# Altium PCB N6480.PcbDoc
Units mil, origin at the board's own origin, x right, y up, seen from the top; angles counter-clockwise.
Board outline 1350 x 1575 mil, 2 copper layers (Top Layer, Bottom Layer); 73 components, 80 nets, 350 pads, 86 vias.
Unrouted connection lines stored in the file: 2.
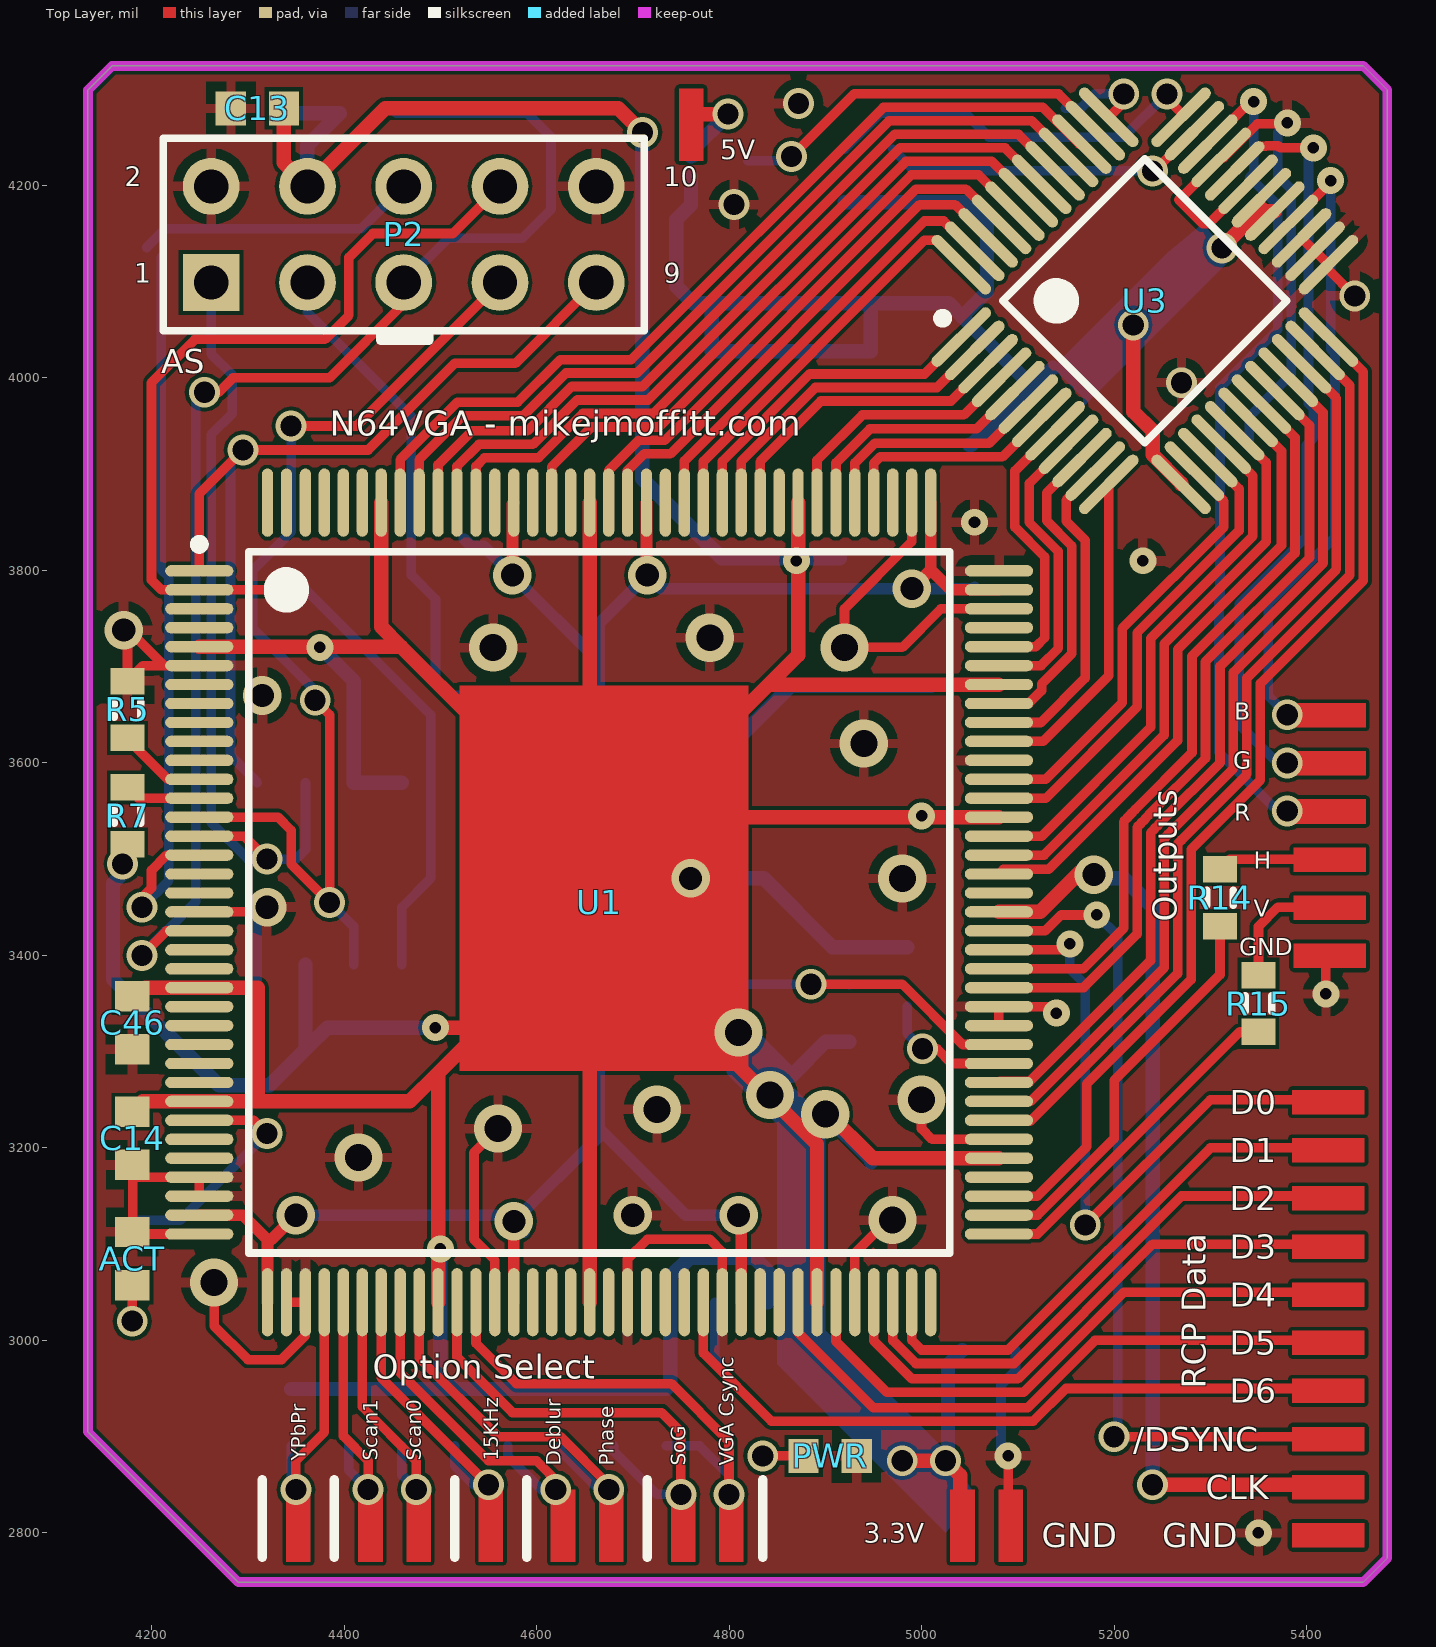
[diagram p0: Top Layer view]
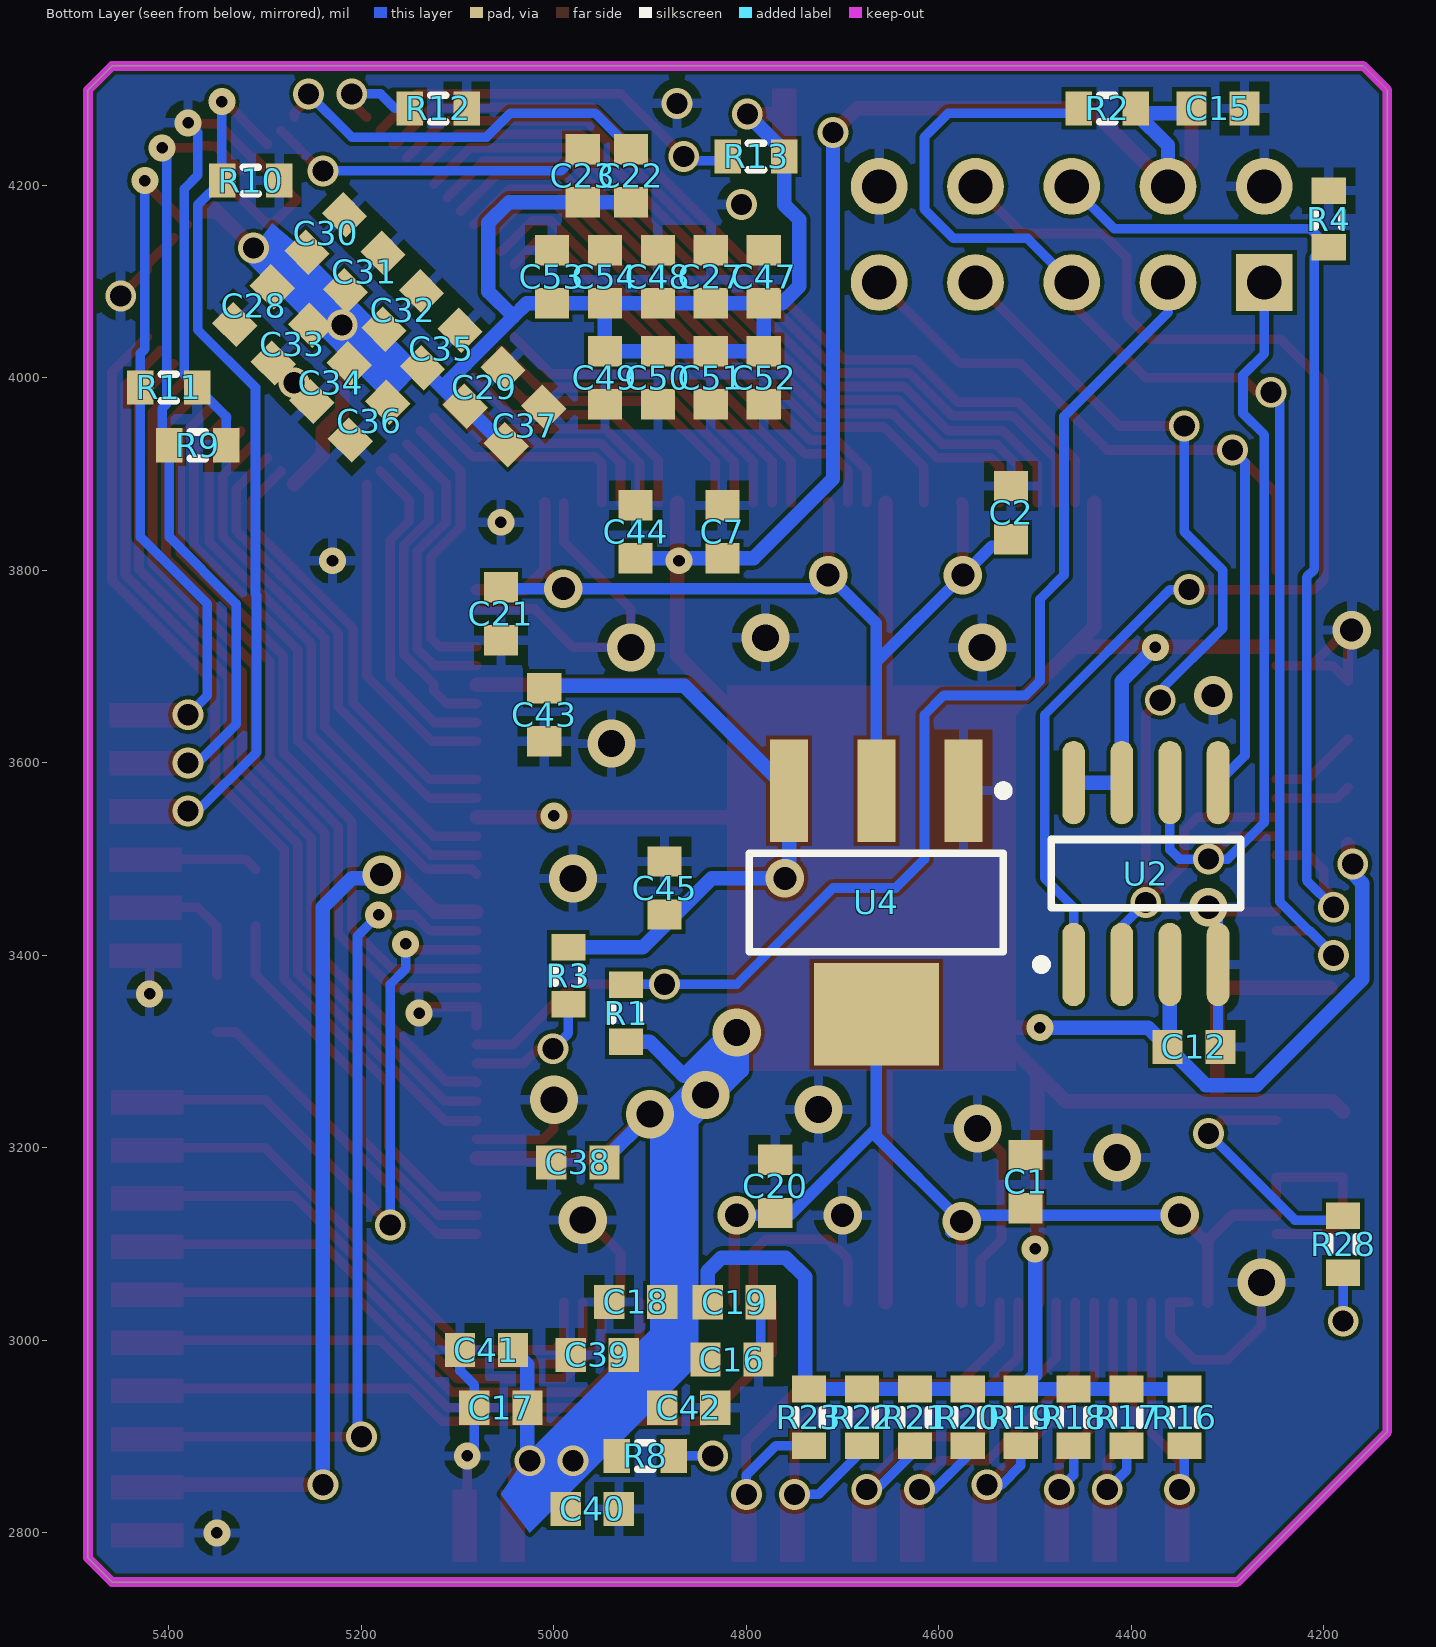
[diagram p1: Bottom Layer view, seen from below]

## Layer stack, top to bottom
Top Solder: solder mask 0.4, Solder Resist, Dk 3.5
Top Layer: signal copper 1.4
Dielectric 1: dielectric 12.6, FR-4, Dk 4.8
Bottom Layer: signal copper 1.4
Bottom Solder: solder mask 0.4, Solder Resist, Dk 3.5

## Board outline
4134,2905 4134,4299 4159,4324 5459,4324 5484,4299 5484,2774 5459,2749 4290,2749

## Design rules (kind name [scope] priority, off if disabled: settings)
Clearance [All] p1: gap=4
PolygonConnect [All] p1: connectstyle=Relief reliefconductorwidth=10 reliefentries=4 polygonreliefangle="90 Angle" airgapwidth=10
RoutingVias [All] p1: holewidth=22 width=32 viastyle="Through Hole" minholewidth=12 minwidth=28 maxholewidth=24 maxwidth=40
SolderMaskExpansion [All] p1: expansion=4
UnpouredPolygon [All] p1: allowunpoured=FALSE
Width Width_VCC3.3 [InNet('VCC3.3')] p1: maxlimit=25 minlimit=15 preferedwidth=20 minimp=50.000000 maximp=50.000000 favimp=50.000000
Width Width_VCC5 [InNet('VCC5.0')] p2: maxlimit=25 minlimit=15 preferedwidth=20 minimp=50.000000 maximp=50.000000 favimp=50.000000
Width Width_VCC1.2 [InNet('VCC1.2')] p3: maxlimit=20 minlimit=12 preferedwidth=16 minimp=50.000000 maximp=50.000000 favimp=50.000000
Width Width_CLK [InNet('CLK50')] p4: maxlimit=20 minlimit=8 preferedwidth=14 minimp=50.000000 maximp=50.000000 favimp=50.000000
Width Width_1 [All] p5: maxlimit=10 minlimit=10 preferedwidth=10
29 further rules are at their usual default settings.

## Components (designator, comment, footprint, x,y, rotation, side; value= is the part's Value field where it differs from the comment)
ACT "User LED" 1608[0603] 4180,3085 r90 top (schematic designator LED2)
C1 "Cap" 1608[0603] 4510,3165 r270 bottom
C2 "Cap" 1608[0603] 4525,3860 r270 bottom
C7 "Cap" 1608[0603] 4825,3840 r90 bottom
C12 "Cap" 1608[0603] 4335,3305 r0 bottom
C13 "Cap" 1608[0603] 4310,4280 r0 top
C14 "Cap" 1608[0603] 4180,3210 r90 top
C15 "Cap" 1608[0603] 4310,4280 r0 bottom
C16 "Cap" 1608[0603] 4815,2980 r0 bottom
C17 "Cap" 1608[0603] 5055,2930 r180 bottom
C18 "Cap" 1608[0603] 4915,3040 r180 bottom
C19 "Cap" 1608[0603] 4812.64,3039.65 r0 bottom
C20 "Cap" 1608[0603] 4770,3160 r270 bottom
C21 "Cap" 1608[0603] 5055,3755 r90 bottom
C22 "Cap" 1608[0603] 4920,4210 r90 bottom
C23 "Cap" 1608[0603] 4970,4210 r270 bottom
C27 "Cap" 1608[0603] 4837,4105 r270 bottom
C28 "Cap" 1608[0603] 5312,4075 r315 bottom
C29 "Cap" 1608[0603] 5072.4,3990 r135 bottom
C30 "Cap" 1608[0603] 5237,4150 r135 bottom
C31 "Cap" 1608[0603] 5197,4110 r135 bottom
C32 "Cap" 1608[0603] 5157,4070 r135 bottom
C33 "Cap" 1608[0603] 5272,4035 r315 bottom
C34 "Cap" 1608[0603] 5232,3995 r315 bottom
C35 "Cap" 1608[0603] 5117,4030 r135 bottom
C36 "Cap" 1608[0603] 5192,3955 r315 bottom
C37 "Cap" 1608[0603] 5030,3950 r135 bottom
C38 "Cap" 1608[0603] 4975,3185 r180 bottom
C39 "Cap" 1608[0603] 4955,2985 r180 bottom
C40 "Cap" 1608[0603] 4960,2825 r0 bottom
C41 "Cap" 1608[0603] 5070,2990 r180 bottom
C42 "Cap" 1608[0603] 4860,2930 r0 bottom
C43 "Cap" 1608[0603] 5010,3650 r90 bottom
C44 "Cap" 1608[0603] 4915,3840 r270 bottom
C45 "Cap" 1608[0603] 4885,3470 r270 bottom
C46 "Cap" 1608[0603] 4180,3330 r90 top
C47 "Cap" 1608[0603] 4782,4105 r90 bottom
C48 "Cap" 1608[0603] 4892,4105 r90 bottom
C49 "Cap" 1608[0603] 4947,4000 r270 bottom
C50 "Cap" 1608[0603] 4892,4000 r270 bottom
C51 "Cap" 1608[0603] 4837,4000 r270 bottom
C52 "Cap" 1608[0603] 4782,4000 r270 bottom
C53 "Cap" 1608[0603] 5002,4105 r90 bottom
C54 "Cap" 1608[0603] 4947,4105 r90 bottom
P2 "AS" HDR2X5 4262,4099 r0 top
PWR "Power LED" 1608[0603] 4905,2880 r0 top (schematic designator LED1)
R1 "Res3" J1-0603 4925,3340 r270 bottom
R2 "Res3" J1-0603 4425,4280 r180 bottom
R3 "Res3" J1-0603 4985,3379 r90 bottom
R4 "Res3" J1-0603 4195,4165 r270 bottom
R5 "Res3" J1-0603 4175,3655.47 r270 top
R7 "Res3" J1-0603 4175,3545 r270 top
R8 "Res3" J1-0603 4905,2880 r0 bottom
R9 "Res3" J1-0603 5370,3930 r0 bottom
R10 "Res3" J1-0603 5315,4205 r0 bottom
R11 "Res3" J1-0603 5400,3990 r0 bottom
R12 "Res3" J1-0603 5120,4280 r180 bottom
R13 "Res3" J1-0603 4790,4230 r180 bottom
R14 "Res3" J1-0603 5310,3460 r90 top
R15 "Res3" J1-0603 5350,3350 r90 top
R16 "Res3" J1-0603 4345,2920 r90 bottom
R17 "Res3" J1-0603 4405,2920 r90 bottom
R18 "Res3" J1-0603 4460,2920 r90 bottom
R19 "Res3" J1-0603 4515,2920 r90 bottom
R20 "Res3" J1-0603 4570,2920 r90 bottom
R21 "Res3" J1-0603 4625,2920 r90 bottom
R22 "Res3" J1-0603 4680,2920 r90 bottom
R23 "Res3" J1-0603 4735,2920 r90 bottom
R28 "Res3" J1-0603 4180,3100 r90 bottom
U1 "EP2C5T144C8N" TQFP144_N 4665,3455 r0 top
U2 "EPCS4SI8N" SOIC8_N 4385,3485 r90 bottom
U3 "ADV7123JSTZ240" ST-48_M 5232,4080 r45 top
U4 "LD1117AS12TR" SOT223_M 4665,3455 r270 bottom

## Footprints (in the part's own frame and the unit in brackets; to place one, negate y for a bottom-side part, rotate by r counter-clockwise, add the part's x,y. Pads: shape width x height; smd on the part's side, far side on the other; paste and mask are expansions set on the pad)
1608[0603] [mm] "Chip Capacitor, Body 1.6x0.8mm, IPC High Density"
  rect 0.8x0.9 smd: 1(-0.7,0) 2(0.7,0)
  body extent -0.87,-0.48 0.87,0.48, height 1.3
HDR2X5 [mm] "Connector; Header; 5x2 Position"
  rect 1.5x1.5 hole 0.9: 1(0,0)
  round 1.5 hole 0.9: 2(0,2.54) 3(2.54,0) 4(2.54,2.54) 5(5.08,0) 6(5.08,2.54) 7(7.62,0) 8(7.62,2.54) 9(10.16,0) 10(10.16,2.54)
  silkscreen extent -1.27,-1.27 11.43,3.81
J1-0603 [mm] "Chip Resistor, Body 1.6x0.8mm, IPC High Density"
  rect 0.7x0.9 smd: 1(-0.75,0) 2(0.75,0)
  silkscreen extent -0.2,-0.35 0.2,0.35, body extent -0.85,-0.48 0.85,0.48, height 0.9
SOIC8_N [mm] "SOIC, 8-Leads, Body 4.9x3.9mm, Pitch 1.27mm, IPC Medium Density"
  oval 2.2x0.6 smd: 1(-2.4,1.905) 2(-2.4,0.635) 3(-2.4,-0.635) 4(-2.4,-1.905) 5(2.4,-1.905) 6(2.4,-0.635) 7(2.4,0.635) 8(2.4,1.905)
  silkscreen extent -2.52,-2.5 0.9,2.88, body extent -2,-2.5 2,2.5, height 1.75
SOT223_M [mm] "SOT223, 4-Leads, Body 6.5x3.5mm, Pitch 2.3mm, Lead Span 7mm, IPC Low Density"
  rect 2.7x1 smd: 1(-2.95,2.3) 2(-2.95,0) 3(-2.95,-2.3)
  rect 2.7x3.3 smd: 4(2.95,0)
  silkscreen extent -3.07,-3.35 1.3,3.47, body extent -1.85,-3.35 1.85,3.35, height 1.7
ST-48_M [mm] "Thin QFP, 48-Leads, Body 7x7mm, Pitch 0.5mm, IPC Low Density"
  oval 2.1x0.3 smd: 1(-4.1,2.75) 2(-4.1,2.25) 3(-4.1,1.75) 4(-4.1,1.25) 5(-4.1,0.75) 6(-4.1,0.25) 7(-4.1,-0.25) 8(-4.1,-0.75) 9(-4.1,-1.25) 10(-4.1,-1.75) 11(-4.1,-2.25) 12(-4.1,-2.75) 25(4.1,-2.75) 26(4.1,-2.25) 27(4.1,-1.75) 28(4.1,-1.25) 29(4.1,-0.75) 30(4.1,-0.25) 31(4.1,0.25) 32(4.1,0.75) 33(4.1,1.25) 34(4.1,1.75) 35(4.1,2.25) 36(4.1,2.75)
  oval 0.3x2.1 smd: 13(-2.75,-4.1) 14(-2.25,-4.1) 15(-1.75,-4.1) 16(-1.25,-4.1) 17(-0.75,-4.1) 18(-0.25,-4.1) 19(0.25,-4.1) 20(0.75,-4.1) 21(1.25,-4.1) 22(1.75,-4.1) 23(2.25,-4.1) 24(2.75,-4.1) 37(2.75,4.1) 38(2.25,4.1) 39(1.75,4.1) 40(1.25,4.1) 41(0.75,4.1) 42(0.25,4.1) 43(-0.25,4.1) 44(-0.75,4.1) 45(-1.25,4.1) 46(-1.75,4.1) 47(-2.25,4.1) 48(-2.75,4.1)
  silkscreen extent -4.22,-2.65 2.65,3.57, body extent -3.5,-3.5 3.5,3.5, height 1.6
TQFP144_N [mm] "Thin QFP, 144-Leads, Body 20x20mm, Pitch 0.5mm, IPC Medium Density"
  oval 1.8x0.3 smd: 1(-10.55,8.75) 2(-10.55,8.25) 3(-10.55,7.75) 4(-10.55,7.25) 5(-10.55,6.75) 6(-10.55,6.25) 7(-10.55,5.75) 8(-10.55,5.25) 9(-10.55,4.75) 10(-10.55,4.25) 11(-10.55,3.75) 12(-10.55,3.25) 13(-10.55,2.75) 14(-10.55,2.25) 15(-10.55,1.75) 16(-10.55,1.25) 17(-10.55,0.75) 18(-10.55,0.25) 19(-10.55,-0.25) 20(-10.55,-0.75) 21(-10.55,-1.25) 22(-10.55,-1.75) 23(-10.55,-2.25) 24(-10.55,-2.75) 25(-10.55,-3.25) 26(-10.55,-3.75) 27(-10.55,-4.25) 28(-10.55,-4.75) 29(-10.55,-5.25) 30(-10.55,-5.75) 31(-10.55,-6.25) 32(-10.55,-6.75) 33(-10.55,-7.25) 34(-10.55,-7.75) 35(-10.55,-8.25) 36(-10.55,-8.75) 73(10.55,-8.75) 74(10.55,-8.25) 75(10.55,-7.75) 76(10.55,-7.25) 77(10.55,-6.75) 78(10.55,-6.25) 79(10.55,-5.75) 80(10.55,-5.25) 81(10.55,-4.75) 82(10.55,-4.25) 83(10.55,-3.75) 84(10.55,-3.25) 85(10.55,-2.75) 86(10.55,-2.25) 87(10.55,-1.75) 88(10.55,-1.25) 89(10.55,-0.75) 90(10.55,-0.25) 91(10.55,0.25) 92(10.55,0.75) 93(10.55,1.25) 94(10.55,1.75) 95(10.55,2.25) 96(10.55,2.75) 97(10.55,3.25) 98(10.55,3.75) 99(10.55,4.25) 100(10.55,4.75) 101(10.55,5.25) 102(10.55,5.75) 103(10.55,6.25) 104(10.55,6.75) 105(10.55,7.25) 106(10.55,7.75) 107(10.55,8.25) 108(10.55,8.75)
  oval 0.3x1.8 smd: 37(-8.75,-10.55) 38(-8.25,-10.55) 39(-7.75,-10.55) 40(-7.25,-10.55) 41(-6.75,-10.55) 42(-6.25,-10.55) 43(-5.75,-10.55) 44(-5.25,-10.55) 45(-4.75,-10.55) 46(-4.25,-10.55) 47(-3.75,-10.55) 48(-3.25,-10.55) 49(-2.75,-10.55) 50(-2.25,-10.55) 51(-1.75,-10.55) 52(-1.25,-10.55) 53(-0.75,-10.55) 54(-0.25,-10.55) 55(0.25,-10.55) 56(0.75,-10.55) 57(1.25,-10.55) 58(1.75,-10.55) 59(2.25,-10.55) 60(2.75,-10.55) 61(3.25,-10.55) 62(3.75,-10.55) 63(4.25,-10.55) 64(4.75,-10.55) 65(5.25,-10.55) 66(5.75,-10.55) 67(6.25,-10.55) 68(6.75,-10.55) 69(7.25,-10.55) 70(7.75,-10.55) 71(8.25,-10.55) 72(8.75,-10.55) 109(8.75,10.55) 110(8.25,10.55) 111(7.75,10.55) 112(7.25,10.55) 113(6.75,10.55) 114(6.25,10.55) 115(5.75,10.55) 116(5.25,10.55) 117(4.75,10.55) 118(4.25,10.55) 119(3.75,10.55) 120(3.25,10.55) 121(2.75,10.55) 122(2.25,10.55) 123(1.75,10.55) 124(1.25,10.55) 125(0.75,10.55) 126(0.25,10.55) 127(-0.25,10.55) 128(-0.75,10.55) 129(-1.25,10.55) 130(-1.75,10.55) 131(-2.25,10.55) 132(-2.75,10.55) 133(-3.25,10.55) 134(-3.75,10.55) 135(-4.25,10.55) 136(-4.75,10.55) 137(-5.25,10.55) 138(-5.75,10.55) 139(-6.25,10.55) 140(-6.75,10.55) 141(-7.25,10.55) 142(-7.75,10.55) 143(-8.25,10.55) 144(-8.75,10.55)
  silkscreen extent -10.67,-9.25 9.25,9.57, body extent -10,-10 10,10, height 1.6

## Part data
ACT PWR: library part LED2, "Typical RED, GREEN, YELLOW, AMBER GaAs LED"
C1 C2 C7 C12 C13 C14 C15 C16 C17 C18 C19 C20 C21 C22 C23 C27 C28 C29 C30 C31 C32 C33 C34 C35 C36 C37 C38 C39 C40 C41 C42 C43 C44 C45 C46 C47 C48 C49 C50 C51 C52 C53 C54: library part "Cap Semi", "Capacitor (Semiconductor SIM Model)"
P2: library part "Header 5X2", "Header, 5-Pin, Dual row"
R1 R2 R3 R4 R5 R7 R8 R9 R10 R11 R12 R13 R14 R15 R16 R17 R18 R19 R20 R21 R22 R23 R28: "Resistor"
U1: "Cyclone II Family, 1.2V FPGA, 89 I/O Pins, 2 PLLs, 144-Pin TQFP, Speed Grade 8, Commercial Grade, Pb-Free"
U2: "EPCS4 Series, In-system programmable 3.3V serial configuration device, 8-Pin SOIC, 4-Megabit, Industrial Grade, Pb-Free"
U3: "3 Channel 10-Bit CMOS High Speed Video Digital-to-Analog Converter, 330 MHz, 0 to 70 degC, ST-48, Pb-Free, Tray"
U4: "1A, Low Drop Positive Voltage Regulator, 1.2V, 4-Pin SOT-223, Tape and Reel"

## Via types
v1: diameter 32, hole 22, Top Layer to Bottom Layer, 43 vias
v2: diameter 28, hole 12, Top Layer to Bottom Layer, 17 vias
v3: diameter 50, hole 28, Top Layer to Bottom Layer, 14 vias
v4: diameter 40, hole 24, Top Layer to Bottom Layer, 12 vias

## Nets (pads, with @x,y where several pads share a name; then routed paths per layer and width w, separated by ;. In a path a pad name is that pad's centre, name@x,y a point inside that pad or via, vN(x,y) a via of type N, cw(c..) or ccw(c..) an arc to the next point about the centre after c; other vN are vias at no path point)
/DSYNC: U1.89 | length 861.3
  Top Layer w10: U1.89 5128.47,3425.47 5145,3442 v2(5182,3442) ; v1(5200,2900) 5400,2900
  Bottom Layer w10: v2(5182,3442) 5204,3420 5204,2904 v1(5200,2900)
/SW_15KHZ: R19.1 U1.43 | length 344.5
  Top Layer w10: U1.43 4438.62,2961.38 v1(4550,2850) 4550,2805
  Bottom Layer w10: R19.1 4515,2870 4535,2850 v1(4550,2850)
/SW_SCAN0: R18.1 U1.42 | length 309.6
  Top Layer w10: U1.42 4418.94,2931.06 4475,2875 v1(4475,2845) 4475,2805
  Bottom Layer w10: R18.1 4460,2860 v1(4475,2845)
/SW_SCAN1: R17.1 U1.41 | length 299.1
  Top Layer w10: U1.41 4399.25,2900.75 4425,2875 v1(4425,2845) 4425,2805
  Bottom Layer w10: R17.1 4405,2865 v1(4425,2845)
/SW_SHARP_COL: R21.1 U1.45 | length 386.4
  Top Layer w10: U1.45 4477.99,2982.01 4560,2900 4625,2900 4675,2850 v1(4675,2845)
  Bottom Layer w10: R21.1 4625,2885 4665,2845 v1(4675,2845)
/SW_SHARP_EN: R20.1 U1.44 | length 388
  Top Layer w10: U1.44 4458.31,2966.69 4550,2875 4600,2875 4625,2850 4625,2825
  Bottom Layer w10: R20.1 4570,2880 4605,2845 v1(4620,2845)
/SW_SOG: R22.1 U1.47 | length 495.9
  Top Layer w10: U1.47 4517.36,2982.64 4575,2925 4730,2925 4750,2905 v1(4750,2840) v1@4750,2825
  Bottom Layer w10: R22.1 4680,2885 4725,2840 v1(4750,2840)
/SW_VGA_CSYNC: R23.1 U1.48 | length 515.4
  Top Layer w10: U1.48 4537.05,2997.05 4579.09,2955 4740,2955 4800,2895 v1(4800,2840) v1@4800,2825
  Bottom Layer w10: R23.1 4769.53,2890.47 4800,2860 v1(4800,2840)
/SW_YPBPR: R16.1 U1.40 | length 294.4
  Top Layer w10: 4350,2805 v1(4350,2845) 4350,2875 4379.57,2904.57 U1.40
  Bottom Layer w10: R16.1 4345,2850 v1(4350,2845)
ASDO: P2.9 U1.1 U2.5 | length 945.9
  Top Layer w10: U1.1 4249.65,3879.65 v1(4295,3925) 4425,3925 4515,4015 4578,4015 P2.9
  Bottom Layer w10: v1(4295,3925) 4282,3912 4282,3607.49 U2.5
CLK50: U1.90 | length 952.3
  Top Layer w15: U1.90 5123.16,3445.16 5165,3487 5168,3484 v4(5179,3484) ; v1(5240,2850) 5400,2850
  Bottom Layer w15: v4(5179,3484) 5183,3480 5210,3480 5240,3450 v1(5240,2850)
CONF_DONE: P2.3 R1.1 U1.83 | length 1338.9
  Top Layer w10: v1(4885,3370) 4980,3370 5042.64,3307.36 U1.83
  Bottom Layer w10: P2.3 4362,4068 4470,3960 4470,3795 4495,3770 4495,3685 4510,3670 4595,3670 4615,3650 4615,3500 4645,3470 4710,3470 4810,3370 v1(4885,3370) 4924.53,3370 R1.1
D0: U1.88 | length 658.7
  Top Layer w10: U1.88 5147.79,3405.79 v2(5154,3412) ; v1(5170,3120) 5300,3250 5400,3250
  Bottom Layer w10: v2(5154,3412) 5154,3386 5170,3370 v1(5170,3120)
D1: U1.71 | length 540.9
  Top Layer w10: U1.71 4989.8,3000.2 5000,2990 5090,2990 5300,3200 5400,3200
D2: U1.70 | length 551.6
  Top Layer w10: U1.70 4970.12,2999.88 4994,2976 5096,2976 5270,3150 5400,3150
D3: U1.69 | length 564
  Top Layer w10: U1.69 4950.43,2999.57 4990,2960 5100,2960 5240,3100 5400,3100
D4: U1.67 | length 594.7
  Top Layer w10: U1.67 4911.06,2998.94 4964,2946 5106,2946 5210,3050 5400,3050
D5: U1.65 | length 621.1
  Top Layer w10: U1.65 4871.69,3008.31 4950,2930 5110,2930 5180,3000 5400,3000
D6: U1.60 | length 723
  Top Layer w10: U1.60 4773.27,2986.73 4844,2916 5116,2916 5150,2950 5400,2950
DATA0: P2.7 U1.14 U2.2 | length 1090.8
  Top Layer w10: U1.14 4331.42,3543.58 4345,3530 4345,3495 v1(4385,3455) 4385,3650 v1(4370,3665) ; v1(4345,3950) 4413,3950 P2.7
  Bottom Layer w10: v1(4345,3950) 4345,3840 4305,3800 4305,3740 4370,3675 v1(4370,3665) ; v1(4385,3455) 4410,3430 U2.2
DCLK: P2.1 U1.15 U2.6 | length 846.8
  Top Layer w10: U1.15 4296.1,3523.9 v1(4320,3500)
  Bottom Layer w10: P2.1 4262,4025 4284,4003 4284,3963 4262,3941 4262,3538 4300,3500 v1(4320,3500) 4350,3500 4360,3510 U2.6
GND: ACT.2 C1.1 C2.1 C7.2 C12.1 C13.1 C14.1 C15.1 C16.1 C17.1 C18.1 C19.1 C20.1 C21.1 C27.1 C28.2 C29.2 C30.2 C31.2 C32.2 C33.2 C34.2 C35.2 C36.2 C37.2 C38.1 C39.1 C40.1 C41.1 C42.1 C43.1 C44.1 C45.1 C46.1 C47.2 C48.2 C49.2 C50.2 C51.2 C52.2 C53.2 C54.2 P2.2 P2.10 PWR.2 R4.1 R5.1 R9.1 R10.1 R11.1 R12.2 U1.6 U1.19 U1.33 U1.34 U1.36 U1.38 U1.39 U1.49 U1.56 U1.61 U1.68 U1.78 U1.84 U1.85 U1.98 U1.106 U1.108 U1.110 U2.4 U3.25 U3.26 U3.27 U3.31 U3.33 U4.1 | length 2890.9
  Top Layer w10: U1.36 4189.49,3110.51 4180.43,3119.57 4180.43,3169.57 U1.33 U1.34 ; U1.19 4315.16,3445.16 v4(4320,3450) ; U1.6 4213.06,3701.06 ; v3(4265,3060) 4265,3015 4300,2980 4335,2980 4359.88,3004.88 U1.39 U1.38 ; U1.49 4556.73,3083.27 4535,3105 4535,3195 v3(4560,3220) ; U1.56 4694.53,3084.53 4715,3105 4780,3105 4792.95,3092.05 U1.61 ; U1.68 4930.75,3090.75 4965,3125 v3(4970,3125) ; U1.110 4989.8,3829.8 4920,3760 v3(4920,3720) 4980,3720 5020.12,3760.12 U1.106 ; v3(5000,3250) 5000,3220 5011.06,3208.94 U1.78 ; U1.84 U1.85 5133.27,3346.73 v2(5140,3340) ; v2(5090,2880) 5090,2817 5094,2813 ; U3.31 5298.48,4160.4 5292,4160.4 5267.4,4185 U3.33 5313.94,4228.94 5349,4264 5379,4264 v2(5380,4265) ; U3.27 U3.25 5422.7,4112.3 v1(5450,4085) ; v2(5420,3360) 5420,3396 5424,3400 ; 4213.06,3701.06 4191.06,3701.06 R5.1 4175,3739.13 4213.06,3701.06
  Bottom Layer w10: C12.1 4310,3307.56 U2.4 4310,3440 v4(4320,3450) ; C19.1 4785.08,2982.36 C16.1 ; v2(5090,2880) 5082.56,2887.44 C17.1 5082.56,2953.56 5097.56,2968.56 C41.1 ; R9.1 5340.47,3960 R11.1 5384,4003.53 5384,4196.33 5370,4210.33 5370,4255 v2(5380,4265)
  other v1: 5270,3995 4805,4180 4872,4285
  other v2: 5350,2800 5230,3810 5055,3850
  other v3: 4415,3190 4725,3240 4980,3480 4940,3620 4555,3720 4780,3730
  other v4: 4700,3130 4315,3670 4171.13,3738
NCE: P2.6 R4.2 U1.16 | length 1083.1
  Top Layer w10: v1(4190,3450) 4190,3460 4200,3470 4200,3488.43 4215.79,3504.21 U1.16 U1.16@4248.86,3505
  Bottom Layer w10: v1(4190,3450) 4218,3478 4218,3793 4210,3801 R4.2@4210,4125 ; R4.2 4214.53,4155 4418,4155 P2.6
NCONFIG: P2.5 R2.1 U1.20 | length 1380.5
  Top Layer w10: v1(4190,3400) 4215.47,3425.47 U1.20 ; v1(4255,3985) 4269.64,3985 4284.64,4000 4385,4000 4462,4077 P2.5
  Bottom Layer w10: v1(4190,3400) 4190,3400.95 4214.53,3425.47 4215,3425 4246,3456 4246,3976 v1(4255,3985) ; R2.1@4454.53,4275 4590,4275 4615,4250 4615,4175 4585,4145 4508,4145 P2.5
NCSO: P2.8 U1.2 U2.1 | length 1306.7
  Top Layer w10: v1(4340,3780) 4339.8,3779.8 U1.2 4210.2,3779.8 4200,3790 4200,3995 4245,4040 4380,4040 4405,4065 4405,4125 4430,4150 4513,4150 P2.8
  Bottom Layer w10: v1(4340,3780) 4360,3780 4490,3650 4490,3480 4460,3450 U2.1
NetACT_1: ACT.1 R28.1 | length 87.9
  Top Layer w10: v1(4180,3020) ACT.1
  Bottom Layer w10: v1(4180,3020) R28.1
NetP4_4: R14.2 | length 114.3
  Top Layer w10: R14.2 5320.47,3500 5420,3500
NetP4_5: R15.2 | length 128.8
  Top Layer w10: R15.2 5350,3430 5370,3450 5420,3450
NetPWR_1: PWR.1 R8.1 | length 82.9
  Top Layer w10: v1(4835,2880) PWR.1
  Bottom Layer w10: v1(4835,2880) R8.1
NSTATUS: R3.1 U1.82 | length 136.3
  Top Layer w10: v1(5001,3303) 5016,3303 5031.32,3287.68 U1.82
  Bottom Layer w10: R3.1@4985,3347 4985,3319 v1(5001,3303)
TCK: R5.2 U1.12 | length 92.1
  Top Layer w10: R5.2@4175,3625 4217.05,3582.95 U1.12
TDI: R7.1 U1.13 | length 79.3
  Top Layer w10: R7.1 4186.26,3563.27 U1.13
TDO: U1.10
TMS: U1.11
USER_LED: R28.2 U1.30 | length 253.3
  Top Layer w10: U1.30 4306.38,3228.62 v1(4320,3215)
  Bottom Layer w10: R28.2@4180,3125 4230,3125 v1(4320,3215)
VCC1.2: C1.2 C2.2 C20.2 C21.2 U1.35 U1.37 U1.50 U1.62 U1.107 U1.109 U1.124 U1.131 U4.2 U4.4 | length 2153
  Top Layer w12: U1.35 4294.8,3130.2 4320.51,3104.49 ; U1.37 4320.51,3104.49 ; v4(4350,3130) 4324.49,3104.49 4320.51,3104.49 ; v4(4575,3795) 4575,3868.94 U1.131 ; U1.50 v4(4576.42,3123.58) ; U1.124 4714.21,3795.79 v4(4715,3795) ; v4(4810,3130) 4812.64,3127.36 U1.62 ; v4(4990,3781.02) 5009.49,3800.51 ; U1.109 5009.49,3800.51 ; U1.107 5030.2,3779.8 5009.49,3800.51
  Bottom Layer w12: v4(4350,3130) 4570,3130 v4(4576.42,3123.58) ; C2.2 4532.44,3825 4545,3825 v4(4575,3795) 4665,3705 ; v4@4587.44,3112.56 v4(4576.42,3123.58) ; U4.4 4665,3220 ; U4.2 4665,3705 ; v4(4810,3130) 4755,3130 4665,3220 ; C21.2 5053.46,3781.02 v4(4990,3781.02) 4728.98,3781.02 v4(4715,3795) 4665,3745 4665,3705 ; v4(4576.42,3123.58) 4665,3212.17 4665,3220
VCC3.3: C7.1 C12.2 C13.2 C14.2 C15.2 C16.2 C17.2 C18.2 C19.2 C38.2 C39.2 C40.2 C41.2 C42.2 C43.2 C44.2 C45.2 C46.2 P2.4 R1.2 R2.2 R3.2 R7.2 R8.2 R16.2 R17.2 R18.2 R19.2 R20.2 R21.2 R22.2 R23.2 U1.5 U1.23 U1.29 U1.46 U1.54 U1.66 U1.77 U1.95 U1.102 U1.116 U1.127 U1.138 U2.3 U2.7 U2.8 U4.3 | length 7805.5
  Top Layer w15: v1(4170,3495) 4175,3500 R7.2 ; C14.2 4190.75,3248.31 U1.29 4315,3248.31 ; C46.2@4193.58,3366.42 U1.23 4310.58,3366.42 4310.58,3252.72 4315,3248.31 ; U1.5 4459.25,3720.75 ; C13.2@4337.56,4275 4337.56,4223.44 P2.4 4443,4280 4685,4280 v1(4710,4255) ; U1.138 4438.62,3741.38 4459.25,3720.75 ; v2(4495,3325) 4525,3325 4535,3315 ; U1.46 4497.68,3277.68 ; 4535,3320 4535,3315 ; 4540,3640 4459.25,3720.75 ; U1.54 4655.16,3315.16 4660,3320 ; U1.127 4655.16,3644.84 4660,3640 ; 4780,3540 4783.58,3543.58 v2@5001.42,3543.58 ; v3@4800,3320 4800,3295 4891.38,3203.62 U1.66 ; 4800,3640 4841.38,3681.38 ; U1.116 4871.69,3711.69 4841.38,3681.38 ; v3@4901.75,3236.75 4949.25,3189.25 U1.77 ; v1(4980,2875) v1(5025,2875) 5040,2860 5040,2810 5047.5,2802.5 ; v2(5000,3545) v2@5001.42,3543.58 ; U1.95 v2@5001.42,3543.58 ; U1.102 4841.38,3681.38 ; 4315,3248.31 4468.31,3248.31 4497.68,3277.68 ; 4497.68,3277.68 4535,3315
  Bottom Layer w15: v1(4170,3495) 4170,3485 4160,3475 4160,3375 4270,3265 4322.56,3265 C12.2 ; C15.2@4337.56,4275 4395.47,4275 4362,4241.53 P2.4 ; R16.2 R17.2 R18.2 R19.2 ; U2.3 4360,3307.56 C12.2 ; v2(4375,3720) 4410,3685 U2.7 U2.8 ; v2@4495,3330.12 v2(4495,3325) 4382.56,3325 C12.2 ; v2(4500,3095) 4500,2964.53 R19.2 ; v1(4710,4255) 4710,3895 4792.56,3812.44 C7.1 C44.2 ; v3(4810,3320) v3@4815,3320 ; C19.2 4840.2,3071.8 4826,3086 4759,3086 4739,3066 4739,2953.53 R23.2 R22.2 R21.2 R20.2 R19.2 ; R1.2 4900.47,3310.47 4865,3275 4820,3320 v3@4815,3320 ; C38.2 4947.44,3187.56 v3(4900,3235) 4887.44,3222.44 4887.44,3197.44 ; R3.2 4907.47,3408.53 4836,3480 v4(4760,3480) 4755.55,3484.45 U4.3 4864.41,3680 C43.2@5010,3680 ; C41.2 5027.44,2975 C17.2 5027.44,2877.44 v1(5025,2875) 4887.44,3012.56 C18.2 4887.44,3197.44 ; v3@4815,3320 4805,3310 4805,3279.88 4887.44,3197.44
  other v2: 4870,3810
  other v3: 4842.5,3255
VCC5.0: C22.1 C23.2 C27.2 C28.1 C29.1 C30.1 C31.1 C32.1 C33.1 C34.1 C35.1 C36.1 C37.1 C47.1 C48.1 C49.1 C50.1 C51.1 C52.1 C53.1 C54.1 R13.2 U3.13 U3.29 U3.30 | length 1552.9
  Top Layer w15: 4759,4268 4759,4273 4760,4274 v1(4799,4274) ; v1(5220,4055) 5220,3965 5240,3945 5240,3920 5269.58,3890.42 U3.13 ; v1(5312,4135) 5350.26,4173.26 ; 5353.1,4176.1 5350.26,4173.26 ; U3.29 5350.26,4173.26
  Bottom Layer w15: 4760.47,4210 4760.47,4180 4745,4164.53 4745,4095 4762.56,4077.44 C47.1 ; R13.2 4760.47,4235.47 v1(4799,4274) ; R13.2@4763.06,4231.06 R13.2@4763.53,4231.53 ; C22.1 C23.2 5046.56,4182.44 5068,4161 5068,4089.68 5042,4063.68 ; C37.1 5051.89,3930.51 C29.1 5096.49,3970.51 5115.97,3990 ; C35.1 5115.97,3990 ; C47.1 C48.1 C54.1 ; C47.1 C52.1 C51.1 C49.1 C54.1 ; C54.1 C53.1 5028.24,4077.44 5042,4063.68 ; 5042,4063.68 5091.36,4014.32 5091.65,4014.32 5115.97,3990
VGA_B0: U1.97 U3.14 | length 458.2
  Top Layer w10: U1.97 5128.95,3582.95 5208.42,3662.42 5208.42,3739.42 5314,3845 5314,3872 5283.5,3902.5 U3.14
VGA_B1: U1.96 U3.15 | length 499.3
  Top Layer w10: U1.96 5129.07,3563.27 5224,3658.2 5224,3735.2 5330,3841.2 5330,3884.56 U3.15
VGA_B2: U1.94 U3.16 | length 556
  Top Layer w10: U1.94 5124.9,3523.9 5238,3637 5238,3729.4 5344,3835.4 5344,3898.4 U3.16
VGA_B3: U1.93 U3.17 | length 596.8
  Top Layer w10: U1.93 5127.21,3504.21 5252,3629 5252,3723.6 5358,3829.6 5358,3912.24 U3.17
VGA_B4: U1.92 U3.18 | length 637.9
  Top Layer w10: U1.92 5085.13,3489.31 5132.11,3489.31 5266.1,3623.3 5266.1,3717.9 5374,3825.8 5374,3924 5339.18,3958.82 U3.18
VGA_B5: U1.87 U3.19 | length 780.1
  Top Layer w10: U1.87 5168.1,3386.1 5210,3428 5210,3538.99 5214,3542.99 5214,3543.2 5218,3547.2 5218,3547.4 5222,3551.4 5222,3551.6 5281,3610.6 5281,3710.9 5388,3817.9 5388,3938 5353.18,3972.82 U3.19
VGA_B6: U1.86 U3.20 | length 820.3
  Top Layer w10: U1.86 5168.22,3366.42 5224,3422.2 5224,3533.2 5228,3537.2 5228,3537.4 5232,3541.4 5232,3541.6 5236,3545.6 5236,3545.8 5295,3604.8 5295,3705.1 5403,3813.1 5403,3950.76 U3.20
VGA_B7: U1.81 U3.21 | length 905.2
  Top Layer w10: U1.81 5081.36,3269 5112.28,3269 5238,3394.72 5238,3527.4 5242,3531.4 5242,3531.6 5246,3535.6 5246,3535.8 5250,3539.8 5250,3540 5310,3600 5310,3700.3 5417,3807.3 5417,3964 5380.94,4000.06 U3.21
VGA_B8: U1.80 U3.22 | length 946.1
  Top Layer w10: U1.80 5113.31,3248.31 5252,3387 5252,3521.6 5256,3525.6 5256,3525.8 5260,3529.8 5260,3530 5324,3594 5324,3694 5431,3801 5431,3979 5395.42,4014.58 U3.22
VGA_B9: U1.79 U3.23 | length 985.9
  Top Layer w10: U1.79 5080.98,3228 5113,3228 5266,3381 5266,3515.8 5270,3519.8 5270,3520 5338,3588 5338,3688.2 5445,3795.2 5445,3992.27 U3.23
VGA_BLANK_N: U1.100 U3.11 | length 344.6
  Top Layer w10: U1.100 5124.01,3642.01 5170,3688 5170,3831.4 5150.28,3851.12 5150.28,3873 U3.11
VGA_CLOCK: U1.75 U3.24 | length 1087.8
  Top Layer w10: U1.75 5120.28,3149.88 5171.7,3201.3 5171.7,3266.7 5280,3375 5280,3510 5352,3582 5352,3682.4 5459,3789.4 5459,4006.11 U3.24
VGA_COMP: C23.1 U3.35 | length 340.2
  Top Layer w10: v1(5240,4215) 5241.73,4215 U3.35
  Bottom Layer w10: C23.1 4992.56,4215 v1(5240,4215)
VGA_G0: U1.120 U3.1 | length 344.8
  Top Layer w10: U1.120 4792.95,3913.15 4883.8,4004 5003,4004 5041.3,4042.3 U3.1
VGA_G1: U1.119 U3.2 | length 333.1
  Top Layer w10: U1.119 4812.64,3913.04 4889.6,3990 5016,3990 5054.5,4028.5 U3.2
VGA_G2: U1.118 U3.3 | length 321.5
  Top Layer w10: U1.118 4832.32,3912.93 4895.4,3976 5030.56,3976 U3.3
VGA_G3: U1.115 U3.4 | length 271.4
  Top Layer w10: U1.115 4891.38,3914.38 4938.6,3961.6 5044,3961.6 U3.4
VGA_G4: U1.114 U3.5 | length 258.3
  Top Layer w10: U1.114 4911.06,3911.66 4946.4,3947 5057.24,3947 U3.5
VGA_G5: U1.113 U3.6 | length 246.7
  Top Layer w10: U1.113 4930.75,3911.55 4951.2,3932 5070,3932 5110.82,3972.82 U3.6
VGA_G6: U1.112 U3.7 | length 235.1
  Top Layer w10: U1.112 4950.43,3911.43 4957,3918 5083.92,3918 U3.7
VGA_G7: U1.104 U3.8 | length 296.6
  Top Layer w10: U1.104 5118.75,3720.75 5128,3730 5128,3814 5097,3845 5097,3903.24 U3.8
VGA_G8: U1.103 U3.9 | length 310.5
  Top Layer w10: U1.103 5124.06,3701.06 5142,3719 5142,3819.8 5111.9,3849.9 5111.9,3890.3 U3.9
VGA_G9: U1.101 U3.10 | length 330.8
  Top Layer w10: U1.101 5111.28,3661.69 5124.79,3675.2 5124.79,3681.99 5156,3713.2 5156,3825.6 5130,3851.6 5130,3880.56 U3.10
VGA_HS: R14.1 U1.74 | length 418.9
  Top Layer w10: U1.74 5120.4,3130.2 5200,3209.8 5200,3270 5310,3380 R14.1
VGA_IOB: R11.2 U3.28 | length 723.3
  Top Layer w10: v1(5380,3650) 5450,3650 ; U3.28 5381.34,4159.34 v2@5423,4201
  Bottom Layer w10: v1(5380,3650) 5360,3670 5360,3765 5429.53,3834.53 R11.2 5429.53,4025.47 5425,4030 v2(5425,4205)
VGA_IOG: R9.2 U3.32 | length 855
  Top Layer w10: U3.32 5350.71,4240.47 5357.47,4240.47 5358.06,4241.06 5370.41,4241.06 5372.47,4239 v2(5407,4239) ; v1(5380,3600) 5440,3600
  Bottom Layer w10: v1(5380,3600) 5370,3600 5330,3640 5330,3765 5399.53,3834.53 R9.2 5407,3937.47 5407,3968.3 5402,3973.3 5402,4234 v2(5407,4239)
VGA_IOR: R10.2 U3.34 | length 948.3
  Top Layer w10: U3.34 5297.86,4242.86 v2@5345,4290 ; v1(5380,3550) 5450,3550
  Bottom Layer w10: v2(5345,4287) 5345,4212.53 5341,4208.53 R10.2 5370,4179.53 5370,4050 5310,3990 5310,3775 5309,3774 5309,3611 5370,3550 v1(5380,3550)
VGA_PSAVE: R13.1 U3.38 | length 408.3
  Top Layer w10: v1(4865,4230) 4930,4295 5142.27,4295 U3.38
  Bottom Layer w10: R13.1@4819.53,4225.47 4865,4225.47 v1(4865,4230)
VGA_R0: U1.137 U3.39 | length 920.4
  Top Layer w10: U1.137 4458.31,3915.11 4517.9,3974.7 4580.5,3974.7 4624.8,4019 4698.41,4019 4960.41,4281 5126,4281 5164.14,4242.86 U3.39
VGA_R1: U1.136 U3.40 | length 880.9
  Top Layer w10: U1.136 4477.99,3914.99 4523.7,3960.7 4586.3,3960.7 4630.6,4005 4704.21,4005 4966.21,4267 5114.6,4267 U3.40
VGA_R2: U1.135 U3.41 | length 838.3
  Top Layer w10: U1.135 4497.68,3909.68 4533,3945 4590.4,3945 4636.4,3991 4710.01,3991 4972.01,4253 5100.76,4253 U3.41
VGA_R3: U1.134 U3.42 | length 798
  Top Layer w10: U1.134 4517.36,3908.16 4540.2,3931 4596.2,3931 4642.2,3977 4715.8,3977 4977.8,4239 5086.92,4239 U3.42
VGA_R4: U1.133 U3.43 | length 758.5
  Top Layer w10: U1.133 4537.05,3908.05 4546,3917 4602,3917 4648,3963 4721.6,3963 4983.6,4225 5073.08,4225 U3.43
VGA_R5: U1.129 U3.44 | length 659.9
  Top Layer w10: U1.129 4615.79,3907.79 4657,3949 4727.4,3949 4989.4,4211 5059.24,4211 U3.44
VGA_R6: U1.126 U3.45 | length 577.9
  Top Layer w10: U1.126 4674.84,3903.84 4706,3935 4733.2,3935 4994.2,4196 5046,4196 5082.66,4159.34 U3.45
VGA_R7: U1.125 U3.46 | length 536.7
  Top Layer w10: U1.125 4694.53,3903.73 4711.8,3921 4739,3921 4998,4180 5034.56,4180 U3.46
VGA_R8: U1.122 U3.47 | length 461.2
  Top Layer w10: U1.122 4753.58,3913.58 5003,4163 5023,4163 5054.5,4131.5 U3.47
VGA_R9: U1.121 U3.48 | length 416.6
  Top Layer w10: U1.121 4773.27,3913.27 5003,4143 5015.89,4143 U3.48
VGA_RSET: R12.1 U3.37 | length 100.5
  Top Layer w10: U3.37 5213.72,4290 5210,4293.72 v1(5210,4295)
  Bottom Layer w10: R12.1 5165,4280 5180,4295 v1(5210,4295)
VGA_SYNC_N: U1.99 U3.12 | length 341.2
  Top Layer w10: U1.99 5126.32,3622.32 5194.42,3690.42 U3.12
VGA_VREF: C22.2 U3.36 | length 409.8
  Top Layer w10: v1(5255,4295) 5255,4290 5269.58,4275.42 U3.36
  Bottom Layer w10: C22.2 4957.44,4275 5045,4275 5070,4250 5210,4250 v1(5255,4295)
VGA_VS: R15.1 U1.73 | length 356.6
  Top Layer w10: U1.73 5120.51,3110.51 5330.47,3320.47 R15.1
pads on no net: U1.3 U1.4 U1.7 U1.8 U1.9 U1.17 U1.18 U1.21 U1.22 U1.24 U1.25 U1.26 U1.27 U1.28 U1.31 U1.32 U1.51 U1.52 U1.53 U1.55 U1.57 U1.58 U1.59 U1.63 U1.64 U1.72 U1.76 U1.91 U1.105 U1.111 U1.117 U1.123 U1.128 U1.130 U1.132 U1.139 U1.140 U1.141 U1.142 U1.143 U1.144

## Polygon pours and split planes (outlines as drawn)
GND on Top Layer "GND Poly - Bottom" (solid, pour order 6): 4134,4299 4158,4323 4159,4324 5459,4324 5484,4299 5484,2774 5459,2749 4290,2749 4134,2905
GND on Bottom Layer "GND Poly - Bottom" (solid, pour order 8): 4134,4299 4158,4323 4159,4324 5459,4324 5484,4299 5484,2774 5459,2749 4290,2749 4134,2905

## Keep-outs
Keep-Out Layer:
  lines w10: 4134,2905 4290,2749 5459,2749 5484,2774 5484,4299 5459,4324 4159,4324 4134,4299 4134,3749 4134,2905

## Other copper
Top Layer:
  region net /SW_YPBPR: 4340,2770 4340,2845 4365,2845 4365,2770
  region net /SW_SCAN1: 4415,2770 4415,2845 4440,2845 4440,2770
  region net /SW_SCAN0: 4465,2770 4465,2845 4490,2845 4490,2770
  region net /SW_15KHZ: 4540,2770 4540,2845 4565,2845 4565,2770
  region net /SW_SHARP_EN: 4615,2770 4615,2845 4640,2845 4640,2770
  region net /SW_SHARP_COL: 4665,2770 4665,2845 4690,2845 4690,2770
  region net /SW_SOG: 4740,2770 4740,2845 4765,2845 4765,2770
  region net /SW_VGA_CSYNC: 4790,2770 4790,2845 4815,2845 4815,2770
  region net GND: 5080,2770 5080,2845 5105,2845 5105,2770
  region net GND: 5461.5,3387 5386.5,3387 5386.5,3412 5461.5,3412
  region net NetP4_5: 5461.5,3437 5386.5,3437 5386.5,3462 5461.5,3462
  region net NetP4_4: 5461.5,3487 5386.5,3487 5386.5,3512 5461.5,3512
  region net VGA_IOR: 5461.5,3537 5386.5,3537 5386.5,3562 5461.5,3562
  region net VGA_IOG: 5461.5,3587 5386.5,3587 5386.5,3612 5461.5,3612
  region net VGA_IOB: 5461.5,3637 5386.5,3637 5386.5,3662 5461.5,3662
  region net VCC3.3: 4820,3680 4820,3280 4520,3280 4520,3680
  region net VCC5.0: 4773.06,4300.5 4773.06,4225.5 4748.06,4225.5 4748.06,4300.5
  region net D1: 5385,3210 5460,3210 5460,3185 5385,3185
  region net D0: 5385,3260 5460,3260 5460,3235 5385,3235
  region net D3: 5385,3110 5460,3110 5460,3085 5385,3085
  region net D2: 5385,3160 5460,3160 5460,3135 5385,3135
  region net D5: 5385,3010 5460,3010 5460,2985 5385,2985
  region net D4: 5385,3060 5460,3060 5460,3035 5385,3035
  region net /DSYNC: 5385,2910 5460,2910 5460,2885 5385,2885
  region net D6: 5385,2960 5460,2960 5460,2935 5385,2935
  region net CLK50: 5385,2860 5460,2860 5460,2835 5385,2835
  region net GND: 5385,2810 5460,2810 5460,2785 5385,2785
  region net VCC3.3: 5030,2770 5030,2845 5055,2845 5055,2770
Bottom Layer:
  region net VCC5.0: 5256.49,4130.51 5292.51,4160.4 5312,4135 5325.47,4127.44 5292.51,4094.49 5168.03,3970 5168.03,3978.97 5136.49,4010.51
  region net VCC3.3: 4810,3320 4895,3235 4900,3235 4900,3010 5025,2885 5055,2840 5025,2800 4850,2975 4850,3225 4810,3265

## Silkscreen, mask and mechanical layers (free items; w line width, h text height)
Top Overlay:
  lines w10: 4315,2775 4315,2855 ; 4390,2775 4390,2855 ; 4515,2775 4515,2855 ; 4590,2775 4590,2855 ; 4715,2775 4715,2855 ; 4835,2775 4835,2855 ; 4438,4039 4488,4039 4488,4047 4438,4047 4438,4039
  text "5V" at 4791,4227 h20
  text "AS" at 4210,4005 h25
  text "N64VGA - mikejmoffitt.com" at 4385,3940 h26
  text "B" at 5325,3645 h18
  text "G" at 5324,3594 h18
  text "R" at 5325,3540 h18
  text "H" at 5345,3490 h18
  text "V" at 5345,3440 h18
  text "Outputs" at 5265,3435 h25 r90
  text "GND" at 5330,3400 h18
  text "D0" at 5320,3235 h25
  text "D1" at 5320,3185 h25
  text "D2" at 5320,3135 h25
  text "D3" at 5320,3085 h25
  text "D4" at 5320,3035 h25
  text "D5" at 5320,2985 h25
  text "Option Select" at 4430,2960 h25
  text "RCP Data" at 5295,2950 h25 r90
  text "D6" at 5320,2935 h25
  text "/DSYNC" at 5220,2885 h25
  text "YPbPr" at 4360,2875 h15 r90
  text "Scan1" at 4435,2875 h15 r90
  text "Scan0" at 4480,2875 h15 r90
  text "15KHz" at 4560,2875 h15 r90
  text "Deblur" at 4625,2870 h15 r90
  text "Phase" at 4680,2870 h15 r90
  text "SoG" at 4755,2870 h15 r90
  text "VGA Csync" at 4805,2870 h15 r90
  text "CLK" at 5295,2835 h25
  text "3.3V" at 4940,2790 h20
  text "GND" at 5125,2785 h25
  text "GND" at 5250,2785 h25
Top Solder:
  region: 4335,2765 4335,2850 4370,2850 4370,2765
  region: 4410,2765 4410,2850 4445,2850 4445,2765
  region: 4460,2765 4460,2850 4495,2850 4495,2765
  region: 4535,2765 4535,2850 4570,2850 4570,2765
  region: 4610,2765 4610,2850 4645,2850 4645,2765
  region: 4660,2765 4660,2850 4695,2850 4695,2765
  region: 4735,2765 4735,2850 4770,2850 4770,2765
  region: 4785,2765 4785,2850 4820,2850 4820,2765
  region: 5075,2765 5075,2850 5110,2850 5110,2765
  region: 5466.5,3382 5381.5,3382 5381.5,3417 5466.5,3417
  region: 5466.5,3432 5381.5,3432 5381.5,3467 5466.5,3467
  region: 5466.5,3482 5381.5,3482 5381.5,3517 5466.5,3517
  region: 5466.5,3532 5381.5,3532 5381.5,3567 5466.5,3567
  region: 5466.5,3582 5381.5,3582 5381.5,3617 5466.5,3617
  region: 5466.5,3632 5381.5,3632 5381.5,3667 5466.5,3667
  region: 4778.06,4305.5 4778.06,4220.5 4743.06,4220.5 4743.06,4305.5
  region: 5380,3215 5465,3215 5465,3180 5380,3180
  region: 5380,3265 5465,3265 5465,3230 5380,3230
  region: 5380,3115 5465,3115 5465,3080 5380,3080
  region: 5380,3165 5465,3165 5465,3130 5380,3130
  region: 5380,3015 5465,3015 5465,2980 5380,2980
  region: 5380,3065 5465,3065 5465,3030 5380,3030
  region: 5380,2915 5465,2915 5465,2880 5380,2880
  region: 5380,2965 5465,2965 5465,2930 5380,2930
  region: 5380,2865 5465,2865 5465,2830 5380,2830
  region: 5380,2815 5465,2815 5465,2780 5380,2780
  region: 5025,2765 5025,2850 5060,2850 5060,2765

## Text inside footprints (layer, text, board x,y; h text height)
P2: Top Overlay "10" at 4732,4199 h20; Top Overlay "9" at 4732,4099 h20; Top Overlay "1" at 4182,4099 h20; Top Overlay "2" at 4172,4199 h20